# EAGLE board main (EAGLE 9.6.2)

Size 73.66 x 68.58 mm. Coordinates in mm from the lower left corner, seen from the top.
Outline: 21.59,0 58.42,0 60.96,2.54 72.39,2.54 73.66,3.81 73.66,68.58 0,68.58 0,1.27 1.27,0 19.05,0 20.32,1.27 21.59,0
Outline: circle at 29.21,7.62 radius 1.27
Outline: circle at 66.04,7.62 radius 1.27
Outline: circle at 66.04,48.26 radius 1.27
Outline: circle at 29.21,48.26 radius 1.27
Copper layers (1*16): Top 0.035mm / dielectric 1.5mm / Bottom 0.035mm
Design rules "default": minimum track width 6mil, minimum drill 0.35mm, track to track 6mil, track to pad 6mil, pad to pad 6mil, via to via 6mil, smd to smd 6mil, copper to edge 40mil, drill to drill 6mil, minimum pad ring 10mil, minimum via ring 8mil, stop-mask expansion 4mil, vias tented up to drill 0mil, thermal gap 10mil

## Footprints (pad centres in the part's own frame; a part is rotated, then mirrored left to right if it is on the bottom)
CAPPRD1000W100D2275H3200B = drill 1.2 pad 1.8: 1 -5,0; 2 5,0
B45181A = drill 0.813 pad 1.6: + -1.27,0 | drill 0.813 pad 1.6 octagon: - 1.27,0
DO-1N4148 = drill 0.9: A -3.81,0; C 3.81,0
1X06_NO_SILK = drill 1.016 pad 1.88: 1 0,0; 2 2.54,0; 3 5.08,0; 4 7.62,0; 5 10.16,0; 6 12.7,0
1X08_NO_SILK = drill 1.016 pad 1.88: 1 0,0; 2 2.54,0; 3 5.08,0; 4 7.62,0; 5 10.16,0; 6 12.7,0; 7 15.24,0; 8 17.78,0
1X05 = drill 1.016 pad 1.88: 1 0,0; 2 2.54,0; 3 5.08,0; 4 7.62,0; 5 10.16,0
0207/7 = drill 0.813 octagon: 1 -3.81,0; 2 3.81,0
1X03 = drill 1.016 pad 1.88: 1 0,0; 2 2.54,0; 3 5.08,0

## Placement (x,y rotation side)
C2  [CAPPRD1000W100D2275H3200B]  11.43,24.13 0 top
C3  [CAPPRD1000W100D2275H3200B]  11.43,12.7 0 top
C4  0.1  [B45181A]  16.51,40.64 0 top
C5  0.1  [B45181A]  3.81,40.64 0 top
D2  [DO-1N4148]  10.16,44.45 0 top
D3  [DO-1N4148]  10.16,46.99 0 top
J1  [1X06_NO_SILK]  22.86,35.56 270 top
J2  [1X06_NO_SILK]  22.86,17.78 270 top
J3  [1X08_NO_SILK]  71.12,44.7 270 top
J4  [1X08_NO_SILK]  71.12,22.86 270 top
J5  [1X06_NO_SILK]  39.37,7.62 0 top
JP1  [1X05]  66.04,25.4 270 top
R5  4.7k  [0207/7]  8.89,60.96 90 top
R6  4.7k  [0207/7]  12.7,60.96 90 top
R7  4.7k  [0207/7]  10.16,53.34 0 top
R8  2.2k  [0207/7]  3.81,49.53 90 top
R9  4.7k  [0207/7]  17.78,49.53 90 top
R10  2.2k  [0207/7]  10.16,49.53 0 top
TEMP1  [1X03]  46.99,24.13 90 top
TEMP2  [1X03]  3.81,58.42 90 top

## Library data of the parts
C2 C3 = Capacitor; CATEGORY: Capacitor
C4 C5 D2 D3 R5-R10 = adafruit
J1 J2 J5 = SparkFun-Connectors; PROD_ID: CONN-08437
J3 J4 = SparkFun-Connectors; PROD_ID: CONN-08438
JP1 = SparkFun
TEMP1 TEMP2 = SparkFun-Connectors

## Nets
3V3: J1.5
5V: J1.4 R5.2 R6.2 TEMP1.3 TEMP2.3
A0: C4.+ D2.C J2.6 R7.1 R8.2
A1: C5.+ D3.C J2.5 R9.1 R10.2
A2: J2.4
A3: J2.3
A4: J2.2
A5: J2.1
ARFF: J3.1
D0: J4.8
D1: J4.7
D2: J4.6
D3: J4.5
D4: J4.4
D5: J4.3 J5.3
D6: J4.2
D7: J4.1
D8: J3.8 R6.1 TEMP1.2
D9: J3.7 R5.1 TEMP2.2
D10: J3.6
D11: J3.5
D12: J3.4
D13: J3.3
GND: C4.- C5.- D2.A D3.A J1.2 J1.3 J3.2 J5.6 R8.1 R10.1 TEMP1.1 TEMP2.1
H5V: JP1.5
HA: JP1.4
HB: JP1.3
HC: JP1.2
HGND: JP1.1
N$1: C2.1 C3.1
N$2: C2.2 C3.2
RESET: J1.6
SENS_IN: R7.2 R9.2
VIN: J1.1

## Tracks (layer width: path | path; a pad name or v marks a point on that pad's centre or on a via)
5V  (4 unrouted)
A0  (4 unrouted)
A1  (4 unrouted)
D5  (1 unrouted)
D8  (2 unrouted)
D9  (2 unrouted)
GND  (11 unrouted)
N$1  (1 unrouted)
N$2  (1 unrouted)
SENS_IN  (1 unrouted)
(copper drawn outside any net)
  shapes: Top area x3